# Altium PCB PCB1.PcbDoc
Units mil, origin at the board's own origin, x right, y up, seen from the top; angles counter-clockwise.
Board outline 2360 x 1180 mil, 2 copper layers (Top Layer, Bottom Layer), stack 12.8 mil thick; 34 components, 28 nets, 103 pads, 27 vias.
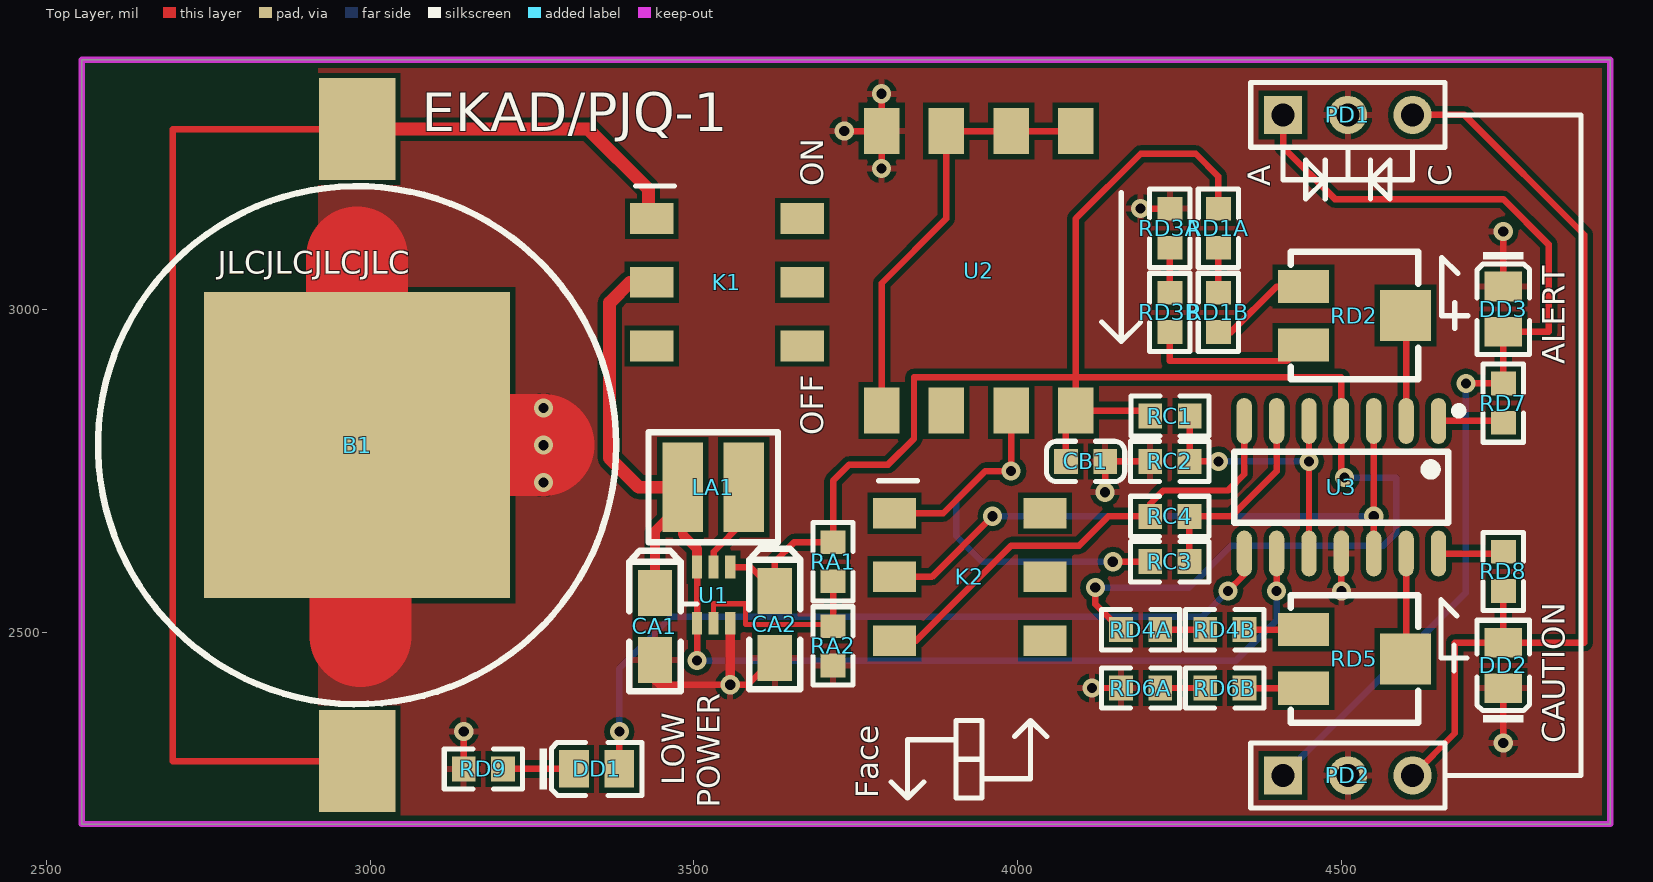
[diagram p0: Top Layer view]
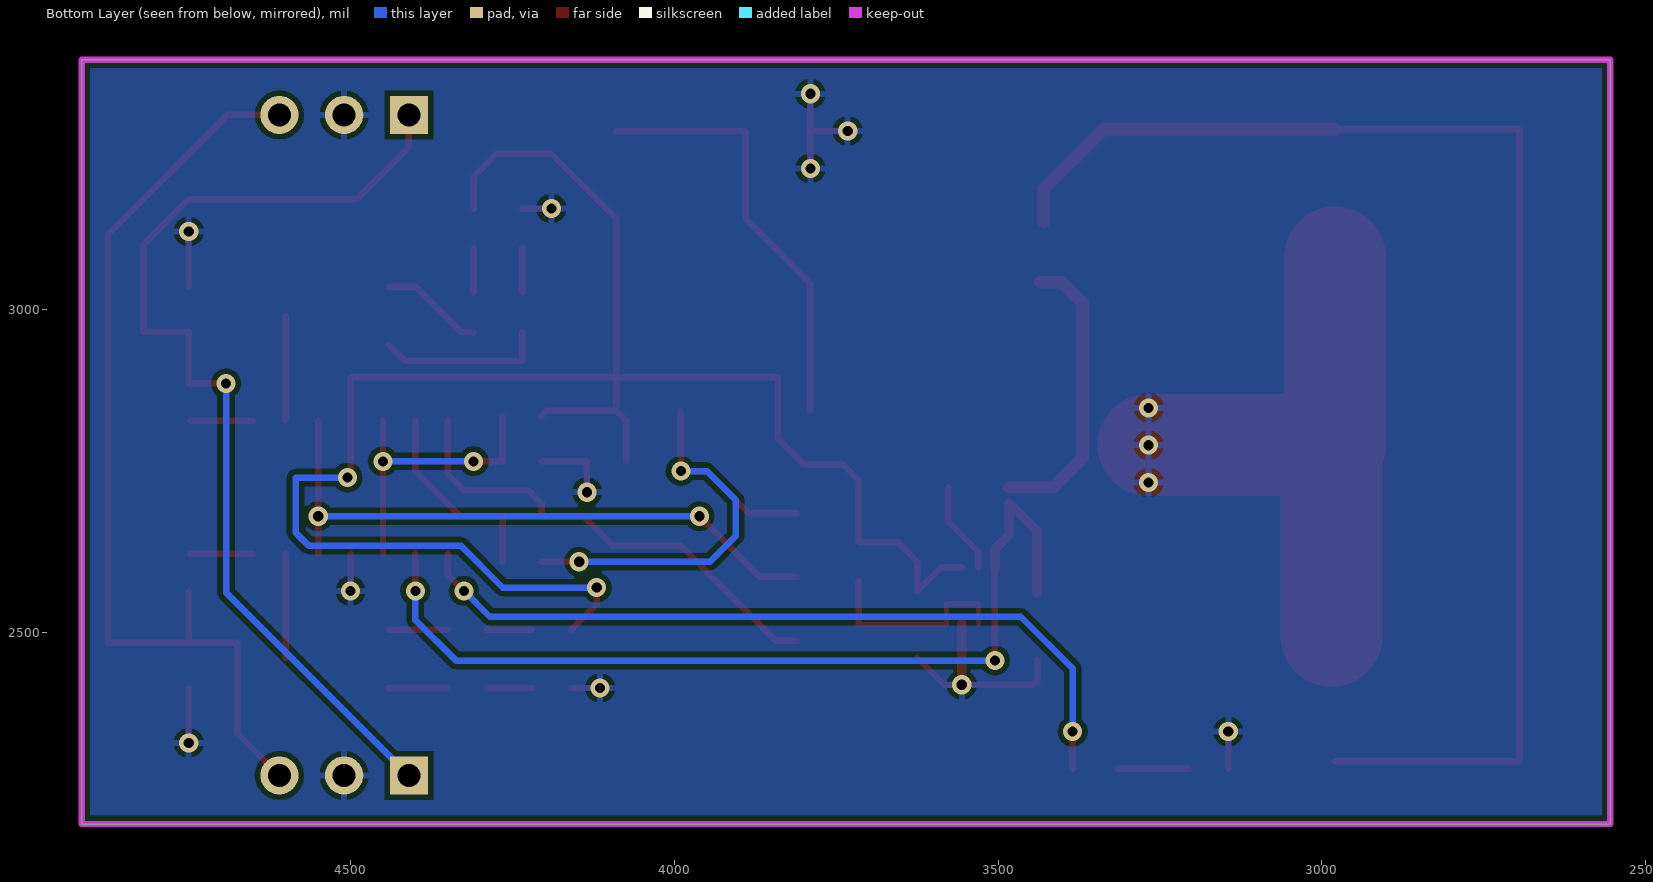
[diagram p1: Bottom Layer view, seen from below]
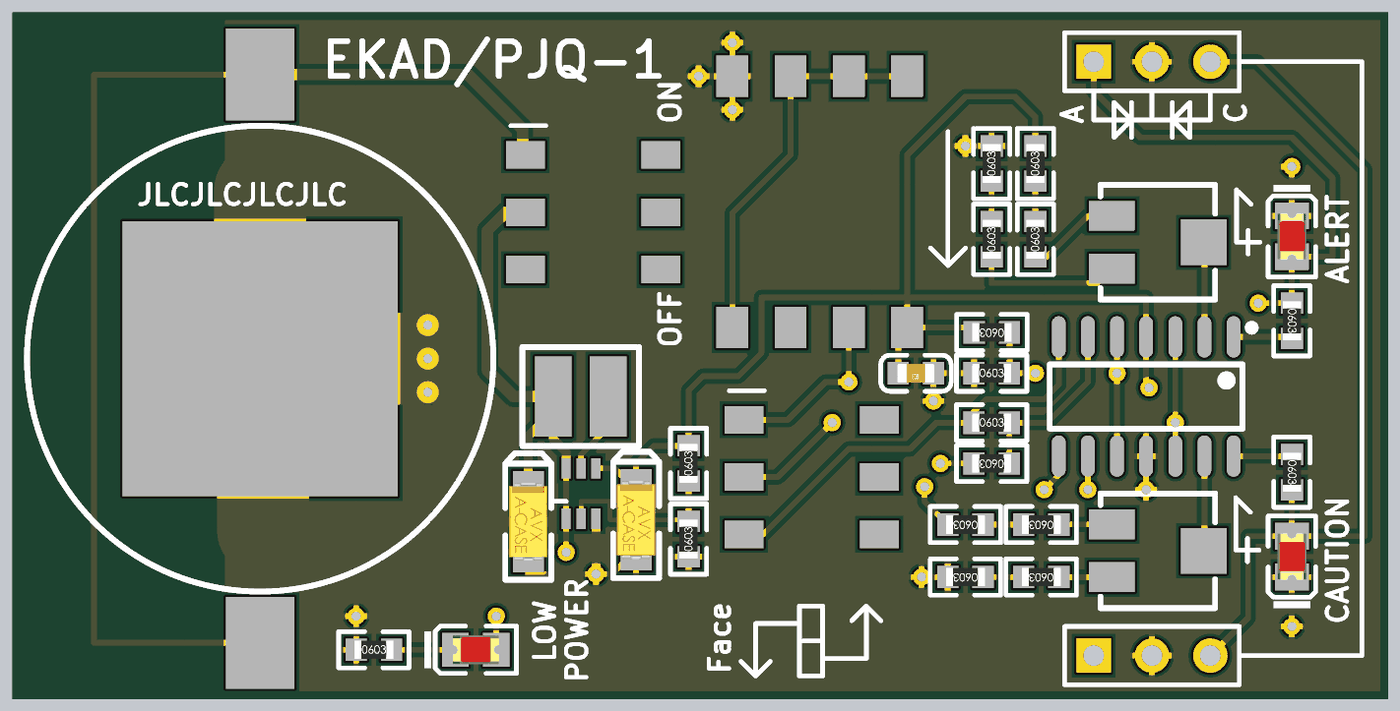
[diagram p2: 3D render of the assembled board from above, using the file's embedded part models]

## Layer stack, top to bottom
Top Layer: signal copper 1.4
Dielectric: core 10, FR-4, Dk 4.2
Bottom Layer: signal copper 1.4

## Board outline
2555,2205 2555,3385 4915,3385 4915,2205

## Design rules (kind name [scope] priority, off if disabled: settings)
Clearance [All] p1: gap=8
ComponentClearance [All] p1 off: gap=10 collisioncheckmode=3 verticalgap=10 showdistances=FALSE
PolygonConnect [All] p1: connectstyle=Relief reliefconductorwidth=10 reliefentries=4 polygonreliefangle="90 Angle"
RoutingVias [All] p1: holewidth=28 width=50 viastyle="Through Hole" minholewidth=28 minwidth=50 maxholewidth=28 maxwidth=50
SilkscreenOverComponentPads SilkToSolderMaskClearance [IsPad] p1: minsilkscreentomaskgap=10
SolderMaskExpansion [All] p1: expansion=4
Width [All] p1: maxlimit=196.85 minlimit=8 preferedwidth=10
26 further rules are at their usual default settings.

## Components (designator, comment, footprint, x,y, rotation, side; value= is the part's Value field where it differs from the comment)
B1 "CR2032" CR2032 2980,2790 r0 top locked
CA1 "10uF (106) ±10% 16V" LC-CASE-A_3216 3440,2510 r90 top
CA2 "10uF (106) ±10% 16V" LC-CASE-A_3216 3625,2513.14 r90 top
CB1 "47n 0603" LC-0603_C 4105,2765 r180 top
DD1 "红灯 0805" LC-0805_LED_S1 3350,2290 r0 top
DD2 "黄灯 0805" LC-0805_LED_S1 4750,2450 r90 top
DD3 "红灯 0805" LC-0805_LED_S1 4750,3000 r270 top
K1 "SPDT" MSS22D18G2 3435,3140 r0 top locked
K2 "SPDT" MSS22D18G2 3810,2685 r0 top locked
LA1 "CD32" CD32 3530,2725 r0 top locked
PD1 "Header 3" HDR1X3 4410,3300 r0 top locked
PD2 "Header 3" HDR1X3 4410,2280 r0 top locked
RA1 "18K 0603" LC-0603_R 3715,2610 r90 top
RA2 "2k 0603" LC-0603_R 3715,2480 r90 top
RC1 "10k 0603" LC-0603_R 4235.31,2835 r180 top
RC2 "10k 0603" LC-0603_R 4235,2765 r0 top
RC3 "10k 0603" LC-0603_R 4235,2610 r180 top
RC4 "10k 0603" LC-0603_R 4235,2680 r0 top
RD1A "0 0603" LC-0603_R 4310,3125 r90 top
RD1B "3k 0603" LC-0603_R 4310,2995 r90 top
RD2 "RPot SM 10k" POT4MM-2 4520,2990 r0 top locked
RD3A "0 0603" LC-0603_R 4235,3125 r90 top
RD3B "3k 0603" LC-0603_R 4235,2995 r90 top
RD4A "10k 0603" LC-0603_R 4190,2505 r180 top
RD4B "2.4k 0603" LC-0603_R 4320,2505 r180 top
RD5 "RPot SM 10k" POT4MM-2 4520,2460 r0 top locked
RD6A "0 0603" LC-0603_R 4190,2415 r180 top
RD6B "2.4k 0603" LC-0603_R 4320,2415 r180 top
RD7 "10k 0603" LC-0603_R 4750,2855 r270 top
RD8 "10k 0603" LC-0603_R 4750,2595 r270 top
RD9 "10k 0603" LC-0603_R 3175,2290 r0 top
U1 "Boost" TPS61220 3505,2515 r90 top
U2 "Angle Sensor" SCA60C 4090,3275 r270 top locked
U3 "LMV324IDR" LC-SOIC-14_150mil 4500,2725 r180 top locked

## Footprints (in the part's own frame and the unit in brackets; to place one, negate y for a bottom-side part, rotate by r counter-clockwise, add the part's x,y. Pads: shape width x height; smd on the part's side, far side on the other; paste and mask are expansions set on the pad)
CD32 [mm]
  rect 1.6x3.5 smd: 1(-1.2,0) 2(1.2,0)
  silkscreen extent -2.54,-2.16 2.54,2.16, body extent -1.49,-1.5 1.5,1.5, height 2.1
CR2032 [mm]
  rect 3x4 smd: 1(0,-12.395) 1(0,12.395)
  rect 12x12 smd: 2(0,0)
  silkscreen extent -10.16,-10.16 10.16,10.16, body extent -10.08,-10.14 10.16,10.14, height 5
HDR1X3 [mm] "Connector; Header; 3 Position"
  rect 1.5x1.5 hole 0.9: 1(0,0)
  round 1.5 hole 0.9: 2(2.54,0) 3(5.08,0)
  silkscreen extent -1.27,-1.27 6.35,1.27
LC-0603_C [mm]
  rect 0.93x0.98 smd: 1(-0.77,0) 2(0.77,0)
  silkscreen extent -1.53,-0.79 1.54,0.79, body extent -0.8,-0.4 0.8,0.4, height 0.3
LC-0603_R [mm]
  rect 0.93x0.98 smd: 1(-0.77,0) 2(0.77,0)
  silkscreen extent -1.53,-0.79 1.54,0.79, body extent -0.85,-0.4 0.85,0.4, height 0.56
LC-0805_LED_S1 [mm]
  rect 1.16x1.47 smd: A(0.89,0) K(-0.89,0)
  silkscreen extent -2.24,-1.04 1.77,1.03, body extent -1.01,-0.62 1.01,0.62, height 1.1
LC-CASE-A_3216 [mm]
  rect 1.8x1.35 smd: 1(1.31,0) 2(-1.31,0)
  silkscreen extent -2.54,-1 2.97,1, body extent -1.7,-0.84 1.7,0.84, height 1.71
LC-SOIC-14_150mil [mm]
  oval 0.6x1.8 smd: 1(-3.81,-2.6) 2(-2.54,-2.6) 3(-1.27,-2.6) 4(0,-2.6) 5(1.27,-2.6) 6(2.54,-2.6) 7(3.81,-2.6) 8(3.81,2.6) 9(2.54,2.6) 10(1.27,2.6) 11(0,2.6) 12(-1.27,2.6) 13(-2.54,2.6) 14(-3.81,2.6)
  silkscreen extent -4.75,-3.15 4.2,1.4
MSS22D18G2 [mm]
  rect 1.7x1.2 smd: 1(0,0) 2(0,-2.5) 3(0,-5) 4(5.9,-5) 5(5.9,-2.5) 6(5.9,0)
  silkscreen extent -0.64,1.27 0.89,1.27, body extent 1.14,-7.18 4.7,2.1, height 5.5
POT4MM-2 [mm] "Square Trimming Potentiometer"
  rect 2x1.3 smd: CCW(-2,-1.15) CW(-2,1.15)
  rect 2x2 smd: W(2,0)
  silkscreen extent -2.5,-2.5 2.5,2.5
SCA60C [mm]
  rect 1.81x1.39 smd: 1(0,0) 2(0,-2.54) 3(0,-5.08) 4(0,-7.62) 5(10.96,-7.62) 6(10.96,-5.08) 7(10.96,-2.54) 8(10.96,0)
  silkscreen extent 2.41,1.78 8.25,2.54, body extent 1.27,-9.08 9.65,1.46, height 5.3
TPS61220 [mm]
  rect 0.9x0.4 smd: 1(0,0) 2(0,-0.65) 3(0,-1.3) 4(2.2,-1.3) 5(2.2,-0.65) 6(2.2,0)
  silkscreen extent 0.76,0 0.76,0.64, body extent 0.38,-1.65 1.78,0.38, height 0.9

## Part data
B1: "Battery"
CA1 CA2: library part "3216 10uF (106) 10% 16V", "钽电"
CB1: library part "0603 4.7nF (472) 10% 50V", "ÌùÆ¬µ"
DD1 DD3: library part "0805 红灯", "发光"
DD2: library part "0805 黄灯", "发光"
K1 K2: library part MSS22D18G2
PD1 PD2: "Header, 3-Pin"
RA1 RA2 RC1 RC2 RC3 RC4 RD1A RD1B RD3A RD3B RD4A RD4B RD6A RD6B RD7 RD8 RD9: library part "0603 68Ω (68R0) 1%", "贴片"
RD2 RD5: library part "RPot SM", "Square Trimming Potentiometer"
U1: library part TPS61220
U2: library part SCA60C
U3: "ÔË·"

## Via types
v1: diameter 29.53, hole 15.75, Top Layer to Bottom Layer, 27 vias

## Nets (pads, with @x,y where several pads share a name; then routed paths per layer and width w, separated by ;. In a path a pad name is that pad's centre, name@x,y a point inside that pad or via, vN(x,y) a via of type N, cw(c..) or ccw(c..) an arc to the next point about the centre after c; other vN are vias at no path point)
+2.5V: RC1.1 RC2.2 U3.5 U3.10 | length 459.1
  Top Layer w10: RC2.2 v1(4310,2765) ; RC2.2@4265.63,2765.31 RC1.1 ; U3.10 U3.5
  Bottom Layer w10: v1(4310,2765) v1(4450,2765)
+5V: CA2.1 CB1.2 RA1.2 RC1.2 RD1A.2 RD4A.2 U1.4 U2.8 U3.4 | length 2962.7
  Top Layer w10: U1.4 3588.1,2601.61 CA2.1 3625,2610 3655.32,2640.32 RA1.2 3715,2735 3740,2760 3800,2760 3840,2800 3840,2895 4090,2895 ; CB1.2 4074.68,2828.19 U2.8 ; v1(4120,2570) 4120,2544.68 RD4A.2 ; RC1.2 4196.5,2843.5 U2.8 ; RD1A.2 4310,3205 4275,3240 4190,3240 4090,3140 4090,2895 ; v1(4505,2740) 4500,2745 U3.4 4500,2895 4090,2895 ; U2.8 4090,2895
  Bottom Layer w10: v1(4120,2570) 4265,2570 4330,2635 4565,2635 4585,2655 4585,2740 v1(4505,2740)
GND: B1.2 CA1.2 CA2.2 CB1.1 DD2.K DD3.K PD1.2 PD2.2 RA2.1 RC2.1 RD3A.2 RD6A.2 RD9.1 U1.3 U2.4 U3.11 | length 1980.9
  Top Layer w10: RD9.1 v1(3144.68,2347.64) ; v1(3267.64,2732.36) v1(3267.64,2790) v1(3267.64,2847.64) ; CA1.2 3440,2425 3445,2420 v1(3556.18,2420) 3583.43,2420 CA2.2 ; v1(3732.36,3275) U2.4 ; v1(3790,3217.36) U2.4 ; v1(3790,3332.64) U2.4 ; v1(4114.68,2415) RD6A.2 ; v1(4135,2717.36) 4135,2764.69 CB1.1 RC2.1 ; v1(4190,3155.32) RD3A.2 ; v1(4500,2565) U3.11 ; v1(4750,2330) DD2.K ; DD3.K v1(4750,3120)
  Top Layer w15: v1(3556.18,2420) U1.3
  Top Layer w157.48: 2980,3080 B1.2 v1(3267.64,2790) ; 2985,2495 B1.2@2985,2785
NetB1_1: B1.1 K1.1 | length 2084.5
  Top Layer w10: B1.1@2980,2302 2695,2302 2695,3278 B1.1@2980,3278
  Top Layer w20: B1.1@2980,3278 3337,3278 3430,3185 K1.1@3430,3135
NetDD1_A: DD1.A U3.8 | length 1212.7
  Top Layer w10: DD1.A v1(3385.04,2347.64) ; v1(4325,2565) 4350,2590 U3.8
  Bottom Layer w10: v1(3385.04,2347.64) 3385.04,2445.04 3465,2525 4285,2525 v1(4325,2565)
NetDD1_K: DD1.K RD9.2 | length 109.6
  Top Layer w10: RD9.2 DD1.K
NetDD2_A: DD2.A PD1.3 PD2.3 RD8.2 | length 1483.2
  Top Layer w10: PD2.3 4675,2345 4675,2485 4675.04,2485.04 DD2.A ; PD1.3 4690,3300 4875,3115 4875,2485 DD2.A DD2.A ; RD8.2 DD2.A
NetDD3_A: DD3.A PD1.1 PD2.1 RD7.1 | length 1586.7
  Top Layer w10: PD1.1 4410,3250 4490,3170 4750,3170 4820,3100 4820,2965 4819.96,2964.96 DD3.A RD7.1 v1(4692.36,2885.31)
  Bottom Layer w10: PD2.1 4692.36,2562.36 v1(4692.36,2885.31)
NetK2_3: K2.3 RC4.1 U3.7 | length 740.3
  Top Layer w10: K2.3 3843.15,2488.15 3990,2635 4095,2635 4140,2680 RC4.1 4204.69,2699.69 4225,2720 4325,2720 4350,2745 U3.7
NetLA1_2: LA1.2 U1.5 | length 142.7
  Top Layer w10: U1.5 3530.59,2625.59 3577.24,2672.24 LA1.2
NetRC3_1: RC3.1 RC4.2 U3.6 | length 311
  Top Layer w10: RC3.1 RC4.2 4330,2680 4400,2750 U3.6
NetRD1A_1: RD1A.1 RD1B.2 | length 69.4
  Top Layer w10: RD1B.2 RD1A.1
NetRD1B_1: RD1B.1 RD2.CW | length 160.1
  Top Layer w10: RD1B.1 4329.69,2964.69 4400,3035 RD2.CW@4440.98,3035
NetRD2_CCW: RD2.CCW RD3B.1 | length 261
  Top Layer w10: RD3B.1 4235,2920 4415.98,2920 RD2.CCW@4440.98,2945
NetRD2_W: RD2.W U3.2 | length 161.4
  Top Layer w10: U3.2 RD2.W@4600,2988.74
NetRD3A_1: RD3A.1 RD3B.2 | length 69.4
  Top Layer w10: RD3B.2 RD3A.1
NetRD4A_1: RD4A.1 RD4B.2 | length 69.4
  Top Layer w10: RD4A.1 RD4B.2
NetRD4B_1: RD4B.1 RD5.CW | length 90.9
  Top Layer w10: RD4B.1@4350.31,2505.28 RD5.CW
NetRD5_CCW: RD5.CCW RD6B.1 | length 90.7
  Top Layer w10: RD6B.1@4350.59,2414.72 RD5.CCW
NetRD5_W: RD5.W U3.13 | length 161.4
  Top Layer w10: RD5.W@4600,2461.26 U3.13
NetRD6A_1: RD6A.1 RD6B.2 | length 69.4
  Top Layer w10: RD6A.1 RD6B.2
NetRD7_2: RD7.2 U3.1 | length 97.3
  Top Layer w10: U3.1 RD7.2@4747.32,2827.36
NetRD8_1: RD8.1 U3.14 | length 97.3
  Top Layer w10: U3.14 RD8.1@4747.32,2622.64
NetU2_1: U2.1 U2.2 U2.3 U2.5 | length 672.9
  Top Layer w10: U2.5 3790,3040 3890,3140 U2.3 U2.2 U2.1
VANGLE: K2.2 U3.3 U3.12 | length 983.5
  Top Layer w10: K2.2 3867.64,2586.57 v1(3961.34,2680.28) ; U3.12 v1(4550,2680.28) U3.3
  Bottom Layer w10: v1(3961.34,2680.28) v1(4550,2680.28)
VFB: RA1.1 RA2.2 U1.2 | length 312.8
  Top Layer w8: U1.2 3530.59,2545 3580,2545 3580,2513.14 RA2.2@3715,2513.14
  Top Layer w10: RA2.2@3715,2513.14 RA1.1
VIN: CA1.1 K1.2 LA1.1 U1.1 U1.6 U3.9 | length 1881
  Top Layer w10: v1(3505,2457.36) U1.1 U1.6 ; v1(4400,2565) U3.9
  Top Layer w15: CA1.1 3440,2657.24 3482.76,2700 3482.76,2652.24 3505,2630 U1.6
  Top Layer w20: K1.2 3401.57,3041.57 3370,3010 3370,2770 3415,2725 LA1.1
  Bottom Layer w10: v1(3505,2457.36) 4337.36,2457.36 4400,2520 v1(4400,2565)
VOUT: K2.1 RC3.2 U2.7 | length 775.3
  Top Layer w10: K2.1 3885,2685 3950,2750 v1(3990,2750) U2.7 ; v1(4147.05,2610) RC3.2
  Bottom Layer w10: v1(3990,2750) 3950,2750 3905,2705 3905,2650 3945,2610 v1(4147.05,2610)
pads on no net: K1.3 K1.4 K1.5 K1.6 K2.4 K2.5 K2.6 U2.6

## Polygon pours and split planes (outlines as drawn)
GND on Bottom Layer "Power3" (solid, pour order 6): 2555,3385 4915,3385 4915,2205 2555,2205
GND on Top Layer "Power3" (solid, pour order 8): 4915,3385 2920,3385 2920,2205 4915,2205

## Keep-outs
Keep-Out Layer:
  the board outline again, w10

## Silkscreen, mask and mechanical layers (free items; w line width, h text height)
Top Overlay:
  lines w8: 3805,2270 3830,2245 ; 3855,2270 3830,2245 ; 3905,2305 3945,2305 ; 3905,2335 3830,2335 3830,2245 ; 3945,2275 4020,2275 4020,2365 ; 3995,2340 4020,2365 ; 4045,2340 4020,2365 ; 4130,2980 4160,2950 ; 4410,3250 4410,3200 4470,3200 ; 4475,3170 4475,3230 ; 4510,3200 4510,3250 ; 4545,3170 4545,3230 ; 4550,3200 4610,3200 4610,3250 ; 4660,2280 4870,2280 4870,3300 4660,3300 ; 4673.74,2441.26 4673.74,2481.26 ; 4675,2970 4675,3010 ; 4678.74,2526.26 4653.74,2551.26 4653.74,2461.26 4693.74,2461.26 ; 4680,3055 4655,3080 4655,2990 4695,2990 ; 4475,3200 4545,3200 ; 4475,3200 4445,3170 4445,3230 4475,3200 ; 4545,3200 4575,3230 4575,3170 4545,3200 ; 3905,2245 3905,2365 3945,2365 3945,2245 3905,2245
  text "EKAD/PJQ-1" at 3080,3275 h60
  text "ON" at 3700,3190 h35 r90
  text "A" at 4390,3190 h35 r90
  text "C" at 4670,3190 h35 r90
  text "JLCJLCJLCJLC" at 2765,3055 h35
  text "ALERT" at 4845,2915 h35 r90
  text "OFF" at 3700,2805 h35 r90
  text "CAUTION" at 4845,2330 h35 r90
  text "LOW" at 3485,2265 h35 r90
  text "Face" at 3785,2245 h35 r90
  text "POWER" at 3540,2230 h35 r90